# EAGLE board atmega_midi_SP0256-AL2 (EAGLE 7.6.0)
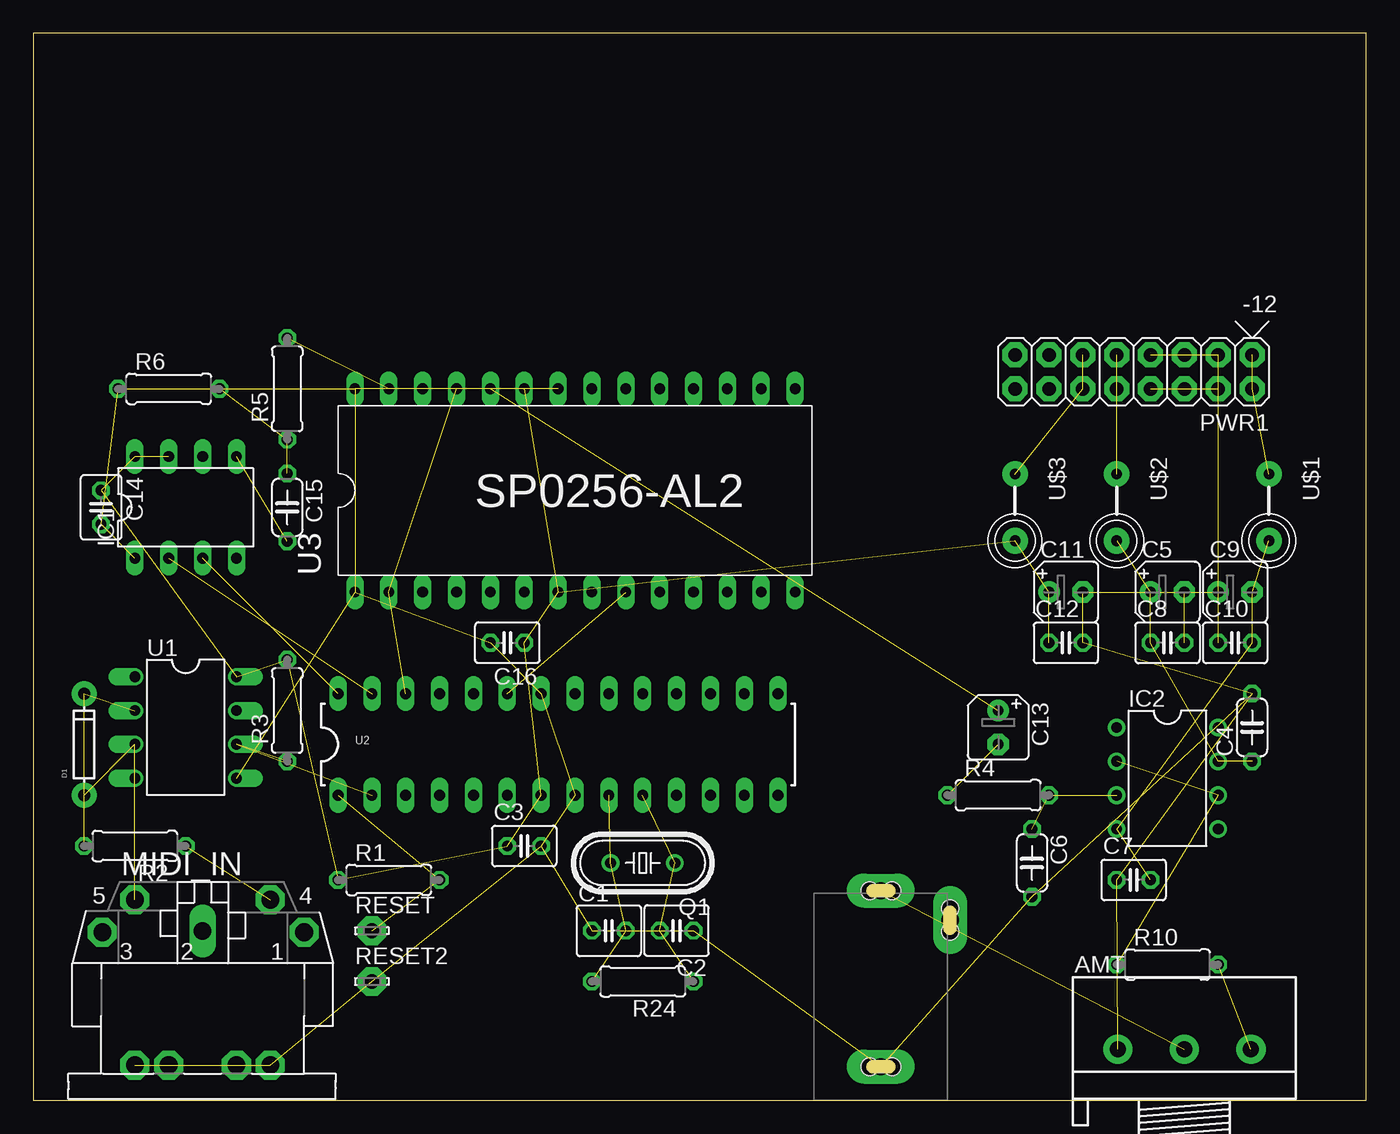
[diagram p0: board, top side]
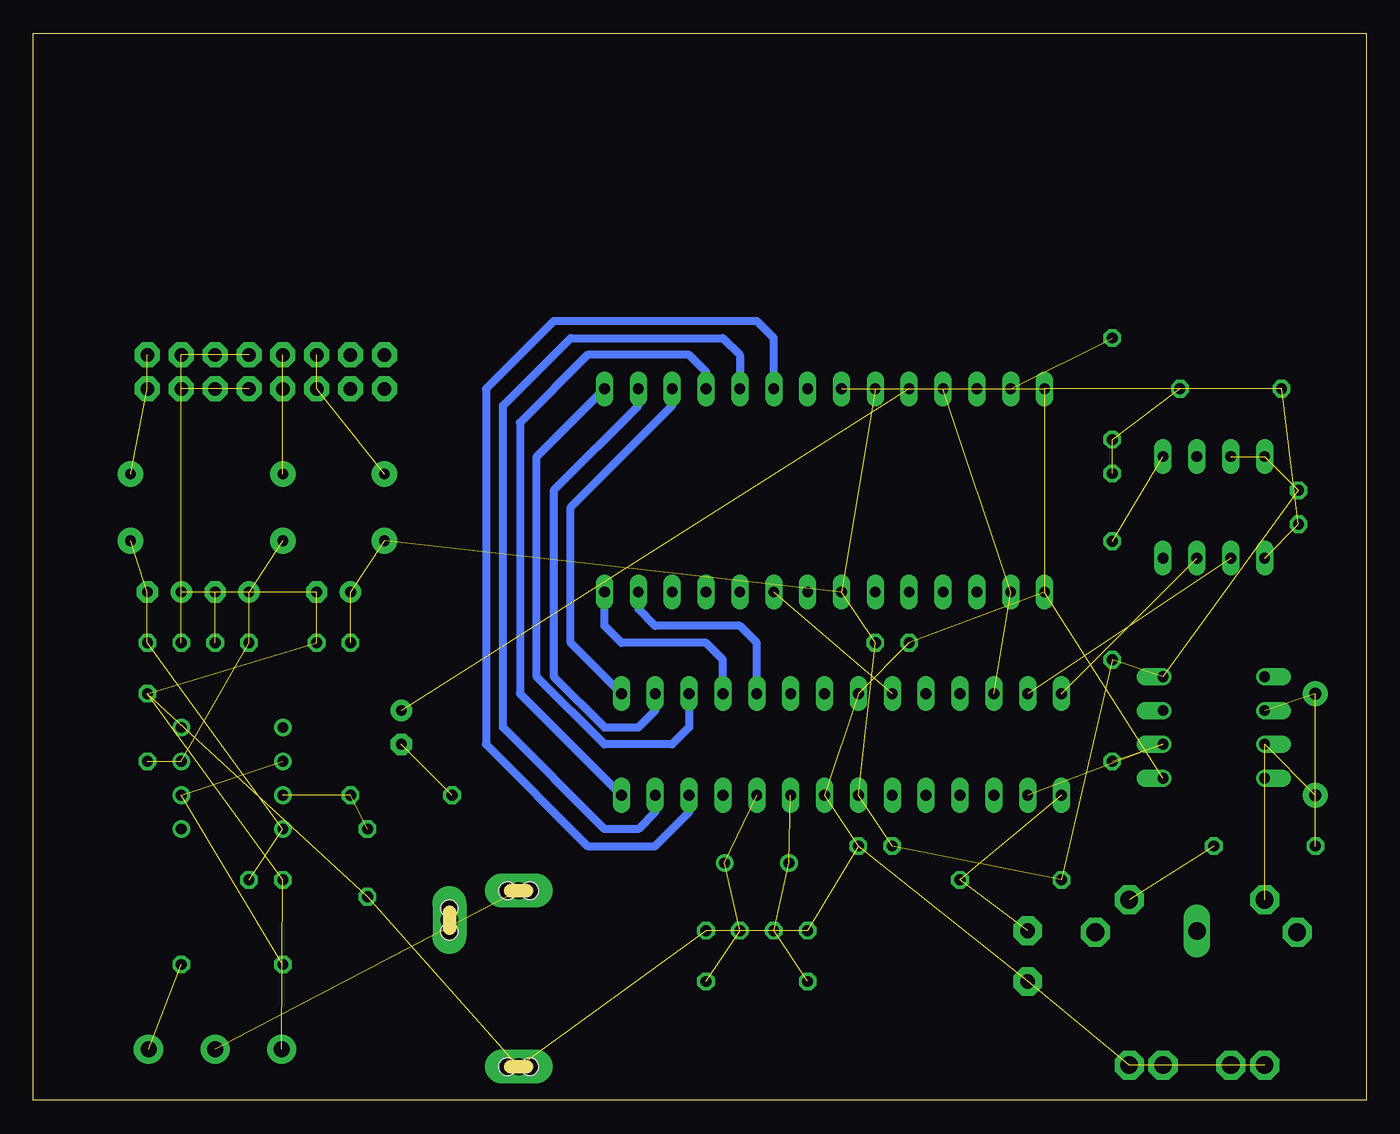
[diagram p1: board, bottom side, seen from below]

Size 100 x 80 mm. Coordinates in mm from the lower left corner, seen from the top.
Outline: 0,0 100,0 100,80 0,80 0,0
Copper layers (1*16): Top 0.035mm / dielectric 1.5mm / Bottom 0.035mm
Design rules "default": minimum track width 10mil, minimum drill 24mil, track to track 8mil, track to pad 8mil, pad to pad 8mil, via to via 8mil, smd to smd 8mil, copper to edge 40mil, drill to drill 8mil, minimum pad ring 10mil, minimum via ring 8mil, stop-mask expansion 4mil, vias tented up to drill 0mil, thermal gap 10mil
Net classes: 1 GND: width 1.016 mm, drill 1.016 mm, clearance 0.508 mm

## Footprints (pad centres in the part's own frame; a part is rotated, then mirrored left to right if it is on the bottom)
3RP/1610N = drill 1.2 pad 2.184: 1 -5,0; 2 0,0; 3 5,0
C025-040X050 = drill 0.813 octagon: 1 -1.27,0; 2 1.27,0
C025-030X050 = drill 0.813 octagon: 1 -1.27,0; 2 1.27,0
C050-024X044 = drill 0.813 octagon: 1 -2.54,0; 2 2.54,0
B45181A = drill 0.813 pad 1.6: + -1.27,0 | drill 0.813 pad 1.6 octagon: - 1.27,0
DIODE-1N4148 = drill 0.9 pad 1.88: A -3.81,0; C 3.81,0
DIL08 = drill 0.813 long: 1 -3.81,-3.81; 2 -1.27,-3.81; 3 1.27,-3.81; 4 3.81,-3.81; 5 3.81,3.81; 6 1.27,3.81; 7 -1.27,3.81; 8 -3.81,3.81
DIL08' = drill 0.813 pad 1.27: 1 -3.81,-3.81; 2 -1.27,-3.81; 3 1.27,-3.81; 4 3.81,-3.81; 5 3.81,3.81; 6 1.27,3.81; 7 -1.27,3.81; 8 -3.81,3.81
CP-2350 = drill 1.321 pad 2.184 octagon: 1 7.62,12.58; 3 -7.52,12.58; 4 5.08,15.02; 5 -5.08,15.02; PE -2.54,2.62; PE1 -5.08,2.62; PE2 5.08,2.62; PE@ 2.54,2.62 | drill 1.321 long: 2 0,12.68
ERTHENVAR-JACK-90DEG = drill 1.3 pad 2.54 long: P$1 5,-2.5; P$2 -0.2,-13.5; P$3 5,-15.7 | hole 1.3: 5.842,-2.489; 4.14,-2.489; -0.203,-12.649; -0.203,-14.351; 5.842,-15.697; 4.166,-15.697
POWER_16 = drill 1.016 pad 1.88 octagon: 1 -6.35,-1.27; 2 -6.35,1.27; 3 -3.81,-1.27; 4 -3.81,1.27; 5 -1.27,-1.27; 6 -1.27,1.27; 7 1.27,-1.27; 8 1.27,1.27; 9 3.81,-1.27; 10 3.81,1.27; 11 6.35,-1.27; 12 6.35,1.27; 13 8.89,-1.27; 14 8.89,1.27; 15 11.43,-1.27; 16 11.43,1.27
HC49/S = drill 0.813: 1 -2.413,0; 2 2.413,0
0207/7 = drill 0.813 octagon: 1 -3.81,0; 2 3.81,0
LSP11 = drill 1.118 pad 2.159 octagon: MP 0,0
DIL08'' = drill 0.813 offset: 1 -3.81,-3.81; 2 -1.27,-3.81; 3 1.27,-3.81; 4 3.81,-3.81; 5 3.81,3.81; 6 1.27,3.81; 7 -1.27,3.81; 8 -3.81,3.81
DIL28-3 = drill 0.813 long: 1 -16.51,-3.81; 2 -13.97,-3.81; 3 -11.43,-3.81; 4 -8.89,-3.81; 5 -6.35,-3.81; 6 -3.81,-3.81; 7 -1.27,-3.81; 8 1.27,-3.81; 9 3.81,-3.81; 10 6.35,-3.81; 11 8.89,-3.81; 12 11.43,-3.81; 13 13.97,-3.81; 14 16.51,-3.81; 15 16.51,3.81; 16 13.97,3.81; 17 11.43,3.81; 18 8.89,3.81; 19 6.35,3.81; 20 3.81,3.81; 21 1.27,3.81; 22 -1.27,3.81; 23 -3.81,3.81; 24 -6.35,3.81; 25 -8.89,3.81; 26 -11.43,3.81; 27 -13.97,3.81; 28 -16.51,3.81
DIL28-6 = drill 0.8 long: P$1 -7.62,16.51; P$2 -7.62,13.97; P$3 -7.62,11.43; P$4 -7.62,8.89; P$5 -7.62,6.35; P$6 -7.62,3.81; P$7 -7.62,1.27; P$8 -7.62,-1.27; P$9 -7.62,-3.81; P$10 -7.62,-6.35; P$11 -7.62,-8.89; P$12 -7.62,-11.43; P$13 -7.62,-13.97; P$14 -7.62,-16.51; P$15 7.62,-16.51; P$16 7.62,-13.97; P$17 7.62,-11.43; P$18 7.62,-8.89; P$19 7.62,-6.35; P$20 7.62,-3.81; P$21 7.62,-1.27; P$22 7.62,1.27; P$23 7.62,3.81; P$24 7.62,6.35; P$25 7.62,8.89; P$26 7.62,11.43; P$27 7.62,13.97; P$28 7.62,16.51
FB = drill 0.8 pad 1.93: P$1 -2.5,0; P$2 2.5,0

## Placement (x,y rotation side)
AMT  100k  [3RP/1610N]  86.36,3.81 0 top
C1  27pF  [C025-040X050]  43.18,12.7 0 top
C2  27pF  [C025-040X050]  48.26,12.7 180 top
C3  .1uF  [C025-030X050]  36.83,19.05 0 top
C4  100n  [C050-024X044]  91.44,27.94 90 top
C5  10u  [B45181A]  85.09,38.1 0 top
C6  3n  [C050-024X044]  74.93,17.78 270 top
C7  100n  [C025-030X050]  82.55,16.51 0 top
C8  100n  [C025-030X050]  85.09,34.29 0 top
C9  10u  [B45181A]  90.17,38.1 0 top
C10  100n  [C025-030X050]  90.17,34.29 0 top
C11  10u  [B45181A]  77.47,38.1 0 top
C12  100n  [C025-030X050]  77.47,34.29 0 top
C13  1uF  [B45181A]  72.39,27.94 270 top
C14  .1uF  [C025-030X050]  5.08,44.45 270 top
C15  47p  [C050-024X044]  19.05,44.45 270 top
C16  100n  [C025-030X050]  35.56,34.29 180 top
D1  [DIODE-1N4148]  3.81,26.67 90 top
IC1  LTC6904  [DIL08]  11.43,44.45 0 top
IC2  TL071P  [DIL08']  85.09,24.13 270 top
MIDI_IN  MIDIJACK  [CP-2350]  12.7,0 0 top
OUTPUT  AUDIO-JACK  [ERTHENVAR-JACK-90DEG]  68.58,0 180 top
PWR1  POWER  [POWER_16]  85.09,54.61 180 top
Q1  [HC49/S]  45.72,17.78 180 top
R1  10k  [0207/7]  26.67,16.51 0 top
R2  220  [0207/7]  7.62,19.05 180 top
R3  270  [0207/7]  19.05,29.21 90 top
R4  10k  [0207/7]  72.39,22.86 0 top
R5  10  [0207/7]  19.05,53.34 90 top
R6  10k  [0207/7]  10.16,53.34 0 top
R10  1k  [0207/7]  85.09,10.16 0 top
R24  1M  [0207/7]  45.72,8.89 180 top
RESET  LSP11  [LSP11]  25.4,12.7 0 top
RESET2  LSP11  [LSP11]  25.4,8.89 0 top
U1  6N138  [DIL08'']  11.43,27.94 270 top
U2  ATMEGA328P_PDIP  [DIL28-3]  39.37,26.67 0 top
U3  SP0256-AL2  [DIL28-6]  40.64,45.72 90 top
U$1  FB  [FB]  92.71,44.45 270 top
U$2  FB  [FB]  81.28,44.45 270 top
U$3  FB  [FB]  73.66,44.45 270 top

## Library data of the parts
AMT = pot
C1-C16 R1-R6 R10 R24 = rcl
D1 = SparkFun-DiscreteSemi
IC1 = linear-technology-3
IC2 = linear
MIDI_IN U$1-U$3 = adafruit
OUTPUT = erthenvar
PWR1 = eurorack
Q1 = crystal; OC_FARNELL: 1667008; OC_NEWARK: unknown
RESET RESET2 = solpad
U1 = optocoupler; MF: VISHAY/TELEFUNKEN; MPN: 6N138; OC_FARNELL: 9860150; OC_NEWARK: 35K5294
U2 = SparkFun-DigitalIC
U3 = speech

## Nets
+5V: C3.1 C11.+ C12.1 C14.1 C16.1 IC1.7 IC1.8 R1.1 R3.2 U1.8 U2.7 U3.P$7 U3.P$23 U$3.P$2
+12V: C4.1 C5.+ C8.1 IC2.7 U$2.P$2
-12V: C7.2 C9.- C10.2 IC2.4 U$1.P$2
A0: U2.14 U3.P$18
A1: U2.15 U3.P$17
A2: U2.16 U3.P$16
A3: U2.17 U3.P$15
A4: U2.18 U3.P$14
A5: U2.19 U3.P$13
GND: AMT.1 C1.1 C2.1 C3.2 C4.2 C5.- C6.2 C7.1 C8.2 C9.+ C10.1 C11.- C12.2 C14.2 C16.2 IC1.1 MIDI_IN.PE MIDI_IN.PE1 MIDI_IN.PE2 MIDI_IN.PE@ OUTPUT.P$1 PWR1.3 PWR1.4 PWR1.5 PWR1.6 PWR1.7 PWR1.8 R6.1 RESET2.MP U1.5 U2.8 U2.22 U3.P$1 U3.P$22 U3.P$28
N$1: U2.26 U3.P$2 U3.P$25
N$2: PWR1.11 PWR1.12 U$3.P$1
N$3: D1.A MIDI_IN.5 U1.3
N$4: C1.2 Q1.2 R24.2 U2.9
N$5: C2.2 Q1.1 R24.1 U2.10
N$6: C6.1 IC2.3 R4.2
N$7: D1.C R2.2 U1.2
N$8: MIDI_IN.4 R2.1
N$9: AMT.3 R10.2
N$10: U2.12 U3.P$20
N$11: PWR1.9 PWR1.10 U$2.P$1
N$12: IC2.2 IC2.6 R10.1
N$13: AMT.2 OUTPUT.P$3
N$14: PWR1.1 PWR1.2 U$1.P$1
N$15: IC1.3 U2.28
N$16: U2.13 U3.P$19
N$17: C13.+ U3.P$24
N$18: IC1.2 U2.27
N$28: U2.23 U3.P$9
N$29: C15.2 IC1.5
N$30: R3.1 U1.6 U2.2
N$32: C13.- R4.1
N$33: R5.2 U3.P$27
N$39: C15.1 R5.1 R6.2
N$43: R1.2 RESET.MP U2.1

## Tracks (layer width: path | path; a pad name or v marks a point on that pad's centre or on a via)
+5V  (13 unrouted)
+12V  (4 unrouted)
-12V  (4 unrouted)
A0
  Bottom 0.61: U3.P$18 49.53,54.61 50.8,55.88 58.42,55.88 63.5,50.8 63.5,30.48 U2.14
A1
  Bottom 0.61: U2.15 59.69,34.29 59.69,44.45 52.07,52.07 U3.P$17
A2
  Bottom 0.61: U3.P$16 54.61,52.07 60.96,45.72 60.96,31.75 57.15,27.94 54.61,27.94 53.34,29.21 U2.16
A3
  Bottom 0.61: U2.17 50.8,27.94 52.07,26.67 57.15,26.67 62.23,31.75 62.23,48.26 U3.P$15
A4
  Bottom 0.61: U2.18 48.26,33.02 49.53,34.29 55.88,34.29 57.15,35.56 U3.P$14
A5
  Bottom 0.61: U2.19 45.72,34.29 46.99,35.56 53.34,35.56 54.61,36.83 U3.P$13
GND  (34 unrouted)
N$1  (2 unrouted)
N$2  (2 unrouted)
N$3  (2 unrouted)
N$4  (3 unrouted)
N$5  (3 unrouted)
N$6  (2 unrouted)
N$7  (2 unrouted)
N$8  (1 unrouted)
N$9  (1 unrouted)
N$10
  Bottom 0.61: U3.P$20 44.45,57.15 45.72,58.42 60.96,58.42 66.04,53.34 66.04,26.67 58.42,19.05 53.34,19.05 50.8,21.59 U2.12
N$11  (2 unrouted)
N$12  (2 unrouted)
N$13  (1 unrouted)
N$14  (2 unrouted)
N$15  (1 unrouted)
N$16
  Bottom 0.61: U2.13 53.34,21.59 54.61,20.32 57.15,20.32 64.77,27.94 64.77,52.07 59.69,57.15 48.26,57.15 46.99,55.88 U3.P$19
N$17  (1 unrouted)
N$18  (1 unrouted)
N$28  (1 unrouted)
N$29  (1 unrouted)
N$30  (2 unrouted)
N$32  (1 unrouted)
N$33  (1 unrouted)
N$39  (2 unrouted)
N$43  (2 unrouted)